# Altium PCB PCB1.PcbDoc
Units mil, origin at the board's own origin, x right, y up, seen from the top; angles counter-clockwise.
Board outline 4204.92 x 2700 mil, 2 copper layers (Top Layer, Bottom Layer); 30 components, 0 nets, 198 pads, 0 vias.
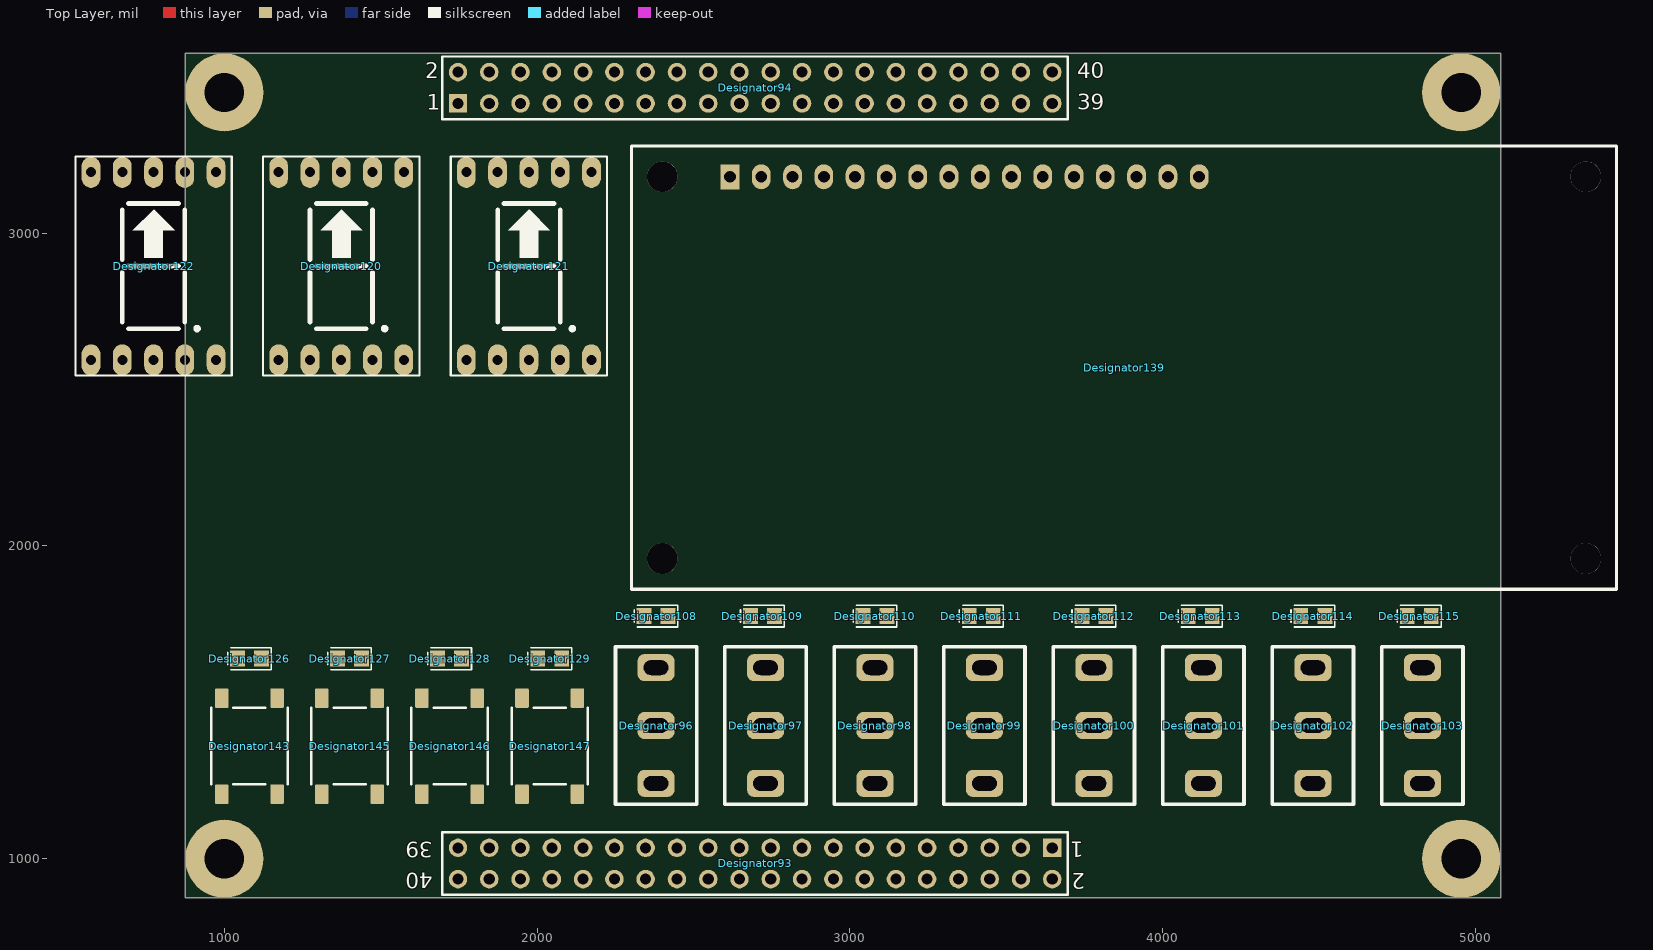
[diagram p0: Top Layer view]
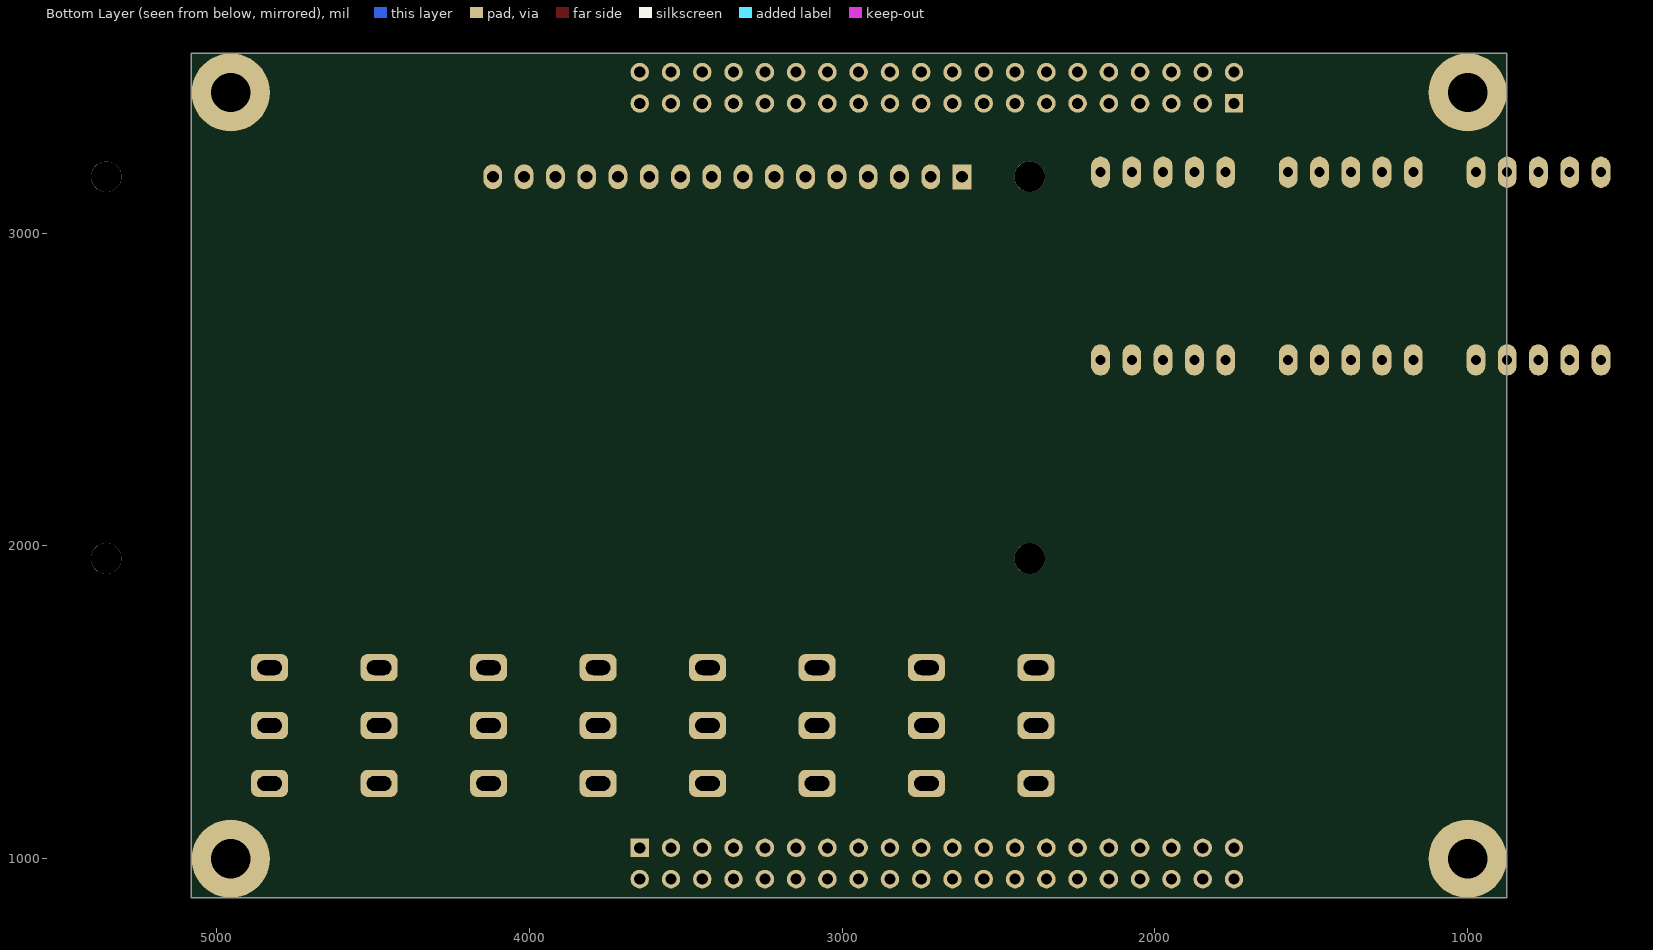
[diagram p1: Bottom Layer view, seen from below]

## Layer stack, top to bottom
Top Solder: solder mask 0.4, Solder Resist, Dk 3.5
Top Layer: signal copper 1.4
Dielectric 1: dielectric 12.6, FR-4, Dk 4.8
Bottom Layer: signal copper 1.4
Bottom Solder: solder mask 0.4, Solder Resist, Dk 3.5

## Board outline
875,875 5079.92,875 5079.92,3575 875,3575

## Design rules (kind name [scope] priority, off if disabled: settings)
Clearance [All] p1: gap=10 ignorepadtopadclearanceinfootprint=FALSE except(0: Arc-Hole Track-Hole SMDPad-Hole THPad-Hole Via-Hole Fill-Hole Poly-Hole Region-Hole Text-Hole)
PolygonConnect [All] p1: connectstyle=Relief reliefconductorwidth=10 reliefentries=4 polygonreliefangle="90 Angle" airgapwidth=10
RoutingVias [All] p1: holewidth=28 width=50 viastyle="Through Hole" minholewidth=28 minwidth=50 maxholewidth=28 maxwidth=50
SolderMaskExpansion [All] p1: expansion=4 istentingtop=FALSE
Width [All] p1: maxlimit=10 minlimit=10 preferedwidth=10
30 further rules are at their usual default settings.

## Components (designator, comment, footprint, x,y, rotation, side; value= is the part's Value field where it differs from the comment)
Designator93 "Comment" HDR2X20 3646.85,1035 r180 top
Designator94 "Comment" HDR2X20 1746.85,3415 r0 top locked
Designator96 "Comment" SW/3/SPDT/SS12D10 2380,1426 r270 top
Designator97 "Comment" SW/3/SPDT/SS12D10 2730,1426 r270 top
Designator98 "Comment" SW/3/SPDT/SS12D10 3080,1426 r270 top
Designator99 "Comment" SW/3/SPDT/SS12D10 3430,1426 r270 top
Designator100 "Comment" SW/3/SPDT/SS12D10 3780,1426 r270 top
Designator101 "Comment" SW/3/SPDT/SS12D10 4130,1426 r270 top
Designator102 "Comment" SW/3/SPDT/SS12D10 4480,1426 r270 top
Designator103 "Comment" SW/3/SPDT/SS12D10 4830,1426 r270 top
Designator108 "Comment" "Led 0805" 2380,1776 r0 top
Designator109 "Comment" "Led 0805" 2720,1776 r0 top
Designator110 "Comment" "Led 0805" 3080,1776 r0 top
Designator111 "Comment" "Led 0805" 3420,1776 r0 top
Designator112 "Comment" "Led 0805" 3780,1776 r0 top
Designator113 "Comment" "Led 0805" 4120,1776 r0 top
Designator114 "Comment" "Led 0805" 4480,1776 r0 top
Designator115 "Comment" "Led 0805" 4820,1776 r0 top
Designator120 "Comment" 7SEGS 1173.5,2595 r0 top
Designator121 "Comment" 7SEGS 1773.5,2595 r0 top
Designator122 "Comment" 7SEGS 573.5,2595 r0 top
Designator126 "Comment" "Led 0805 Blue" 1080,1640 r0 top
Designator127 "Comment" "Led 0805 Blue" 1400,1640 r0 top
Designator128 "Comment" "Led 0805 Blue" 1720,1640 r0 top
Designator129 "Comment" "Led 0805 Blue" 2040,1640 r0 top
Designator139 "Comment" "LCD 16x2" 2616.54,3180.47 r0 top
Designator143 "Comment" SW/4/SMD/XS 1080,1360 r270 top
Designator145 "Comment" SW/4/SMD/XS 1400,1360 r270 top
Designator146 "Comment" SW/4/SMD/XS 1720,1360 r270 top
Designator147 "Comment" SW/4/SMD/XS 2040,1360 r270 top

## Footprints (in the part's own frame and the unit in brackets; to place one, negate y for a bottom-side part, rotate by r counter-clockwise, add the part's x,y. Pads: shape width x height; smd on the part's side, far side on the other; paste and mask are expansions set on the pad)
7SEGS [mil] "DIP 10 Leads; Body 12 x 15 mm; Pitch 0.5 mm"
  oval 60x100 hole 32: 1(0,0) 2(100,0) 3(200,0) 4(300,0) 5(400,0) 6(400,600) 7(300,600) 8(200,600) 9(100,600) 10(0,600)
  silkscreen extent -50,-50 450,650, body extent -50,-75 450,675, height 316
HDR2X20 [mm] "Connector; Header; 20x2 Position"
  rect 1.5x1.5 hole 0.9: 1(0,0)
  round 1.5 hole 0.9: 2(0,2.54) 3(2.54,0) 4(2.54,2.54) 5(5.08,0) 6(5.08,2.54) 7(7.62,0) 8(7.62,2.54) 9(10.16,0) 10(10.16,2.54) 11(12.7,0) 12(12.7,2.54) 13(15.24,0) 14(15.24,2.54) 15(17.78,0) 16(17.78,2.54) 17(20.32,0) 18(20.32,2.54) 19(22.86,0) 20(22.86,2.54) 21(25.4,0) 22(25.4,2.54) 23(27.94,0) 24(27.94,2.54) 25(30.48,0) 26(30.48,2.54) 27(33.02,0) 28(33.02,2.54) 29(35.56,0) 30(35.56,2.54) 31(38.1,0) 32(38.1,2.54) 33(40.64,0) 34(40.64,2.54) 35(43.18,0) 36(43.18,2.54) 37(45.72,0) 38(45.72,2.54) 39(48.26,0) 40(48.26,2.54)
  silkscreen extent -1.27,-1.27 49.53,3.81, body extent -1.42,-1.27 49.68,3.73, height 8.5
"LCD 16x2" [mil]
  rect 60x80 / inner round 60 / far side rect 60x80 hole 38: 1(0,0)
  oval 60x80 / inner round 60 / far side oval 60x80 hole 38: 2(100,0) 3(200,0) 4(300,0) 5(400,0) 6(500,0) 7(600,0) 8(700,0) 9(800,0) 10(900,0) 11(1000,0) 12(1100,0) 13(1200,0) 14(1300,0) 15(1400,0) 16(1500,0)
  round 98.43 hole 98.43: HOLE(-216.54,0) HOLF(2736.22,0) HOLG(2736.22,-1220.47) HOLH(-216.54,-1220.47)
  silkscreen extent -315,-1319 2835,98, body extent -315,-1319 2835,98, height 433
"Led 0805" [mm] "Led SMD 0805"
  rect 1.2x1.3 smd: 1(-0.975,0) 2(0.975,0)
  silkscreen extent -1.78,-0.89 1.78,0.89, body extent -1.01,-0.64 1.01,0.61, height 1.1
"Led 0805 Blue" [mm] "Led SMD 0805"
  rect 1.2x1.3 smd: 1(-0.975,0) 2(0.975,0)
  silkscreen extent -1.78,-0.89 1.78,0.89, body extent -1.01,-0.62 1.01,0.63, height 1.1
SW/3/SPDT/SS12D10 [mm]
  rrect50% 2.2x3 hole 1.2 slot 2 at 90 deg: 1(-4.7,0) 2(0,0) 3(4.7,0)
  silkscreen extent -6.4,-3.3 6.4,3.3, body extent -6.4,-3.3 6.35,3.8, height 12.5
SW/4/SMD/XS [mm]
  rrect20% 1.6x1.1 smd: 1(-3.9,-2.25) 1(3.9,-2.25) 2(-3.9,2.25) 2(3.9,2.25)
  silkscreen extent -3.1,-3.1 3.1,3.1, body extent -4.5,-3 4.5,3, height 7

## Free pads (board coordinates)
  round 250 hole 125.98: ""(1000,1000) ""(1000,3450) ""(4954.33,1000) ""(4954.33,3450)

## Nets (pads, with @x,y where several pads share a name; then routed paths per layer and width w, separated by ;. In a path a pad name is that pad's centre, name@x,y a point inside that pad or via, vN(x,y) a via of type N, cw(c..) or ccw(c..) an arc to the next point about the centre after c; other vN are vias at no path point)
pads on no net: Designator93.1 Designator93.2 Designator93.3 Designator93.4 Designator93.5 Designator93.6 Designator93.7 Designator93.8 Designator93.9 Designator93.10 Designator93.11 Designator93.12 Designator93.13 Designator93.14 Designator93.15 Designator93.16 Designator93.17 Designator93.18 Designator93.19 Designator93.20 Designator93.21 Designator93.22 Designator93.23 Designator93.24 Designator93.25 Designator93.26 Designator93.27 Designator93.28 Designator93.29 Designator93.30 Designator93.31 Designator93.32 Designator93.33 Designator93.34 Designator93.35 Designator93.36 Designator93.37 Designator93.38 Designator93.39 Designator93.40 Designator94.1 Designator94.2 Designator94.3 Designator94.4 Designator94.5 Designator94.6 Designator94.7 Designator94.8 Designator94.9 Designator94.10 Designator94.11 Designator94.12 Designator94.13 Designator94.14 Designator94.15 Designator94.16 Designator94.17 Designator94.18 Designator94.19 Designator94.20 Designator94.21 Designator94.22 Designator94.23 Designator94.24 Designator94.25 Designator94.26 Designator94.27 Designator94.28 Designator94.29 Designator94.30 Designator94.31 Designator94.32 Designator94.33 Designator94.34 Designator94.35 Designator94.36 Designator94.37 Designator94.38 Designator94.39 Designator94.40 Designator96.1 Designator96.2 Designator96.3 Designator97.1 Designator97.2 Designator97.3 Designator98.1 Designator98.2 Designator98.3 Designator99.1 Designator99.2 Designator99.3 Designator100.1 Designator100.2 Designator100.3 Designator101.1 Designator101.2 Designator101.3 Designator102.1 Designator102.2 Designator102.3 Designator103.1 Designator103.2 Designator103.3 Designator108.1 Designator108.2 Designator109.1 Designator109.2 Designator110.1 Designator110.2 Designator111.1 Designator111.2 Designator112.1 Designator112.2 Designator113.1 Designator113.2 Designator114.1 Designator114.2 Designator115.1 Designator115.2 Designator120.1 Designator120.2 Designator120.3 Designator120.4 Designator120.5 Designator120.6 Designator120.7 Designator120.8 Designator120.9 Designator120.10 Designator121.1 Designator121.2 Designator121.3 Designator121.4 Designator121.5 Designator121.6 Designator121.7 Designator121.8 Designator121.9 Designator121.10 Designator122.1 Designator122.2 Designator122.3 Designator122.4 Designator122.5 Designator122.6 Designator122.7 Designator122.8 Designator122.9 Designator122.10 Designator126.1 Designator126.2 Designator127.1 Designator127.2 Designator128.1 Designator128.2 Designator129.1 Designator129.2 Designator139.1 Designator139.2 Designator139.3 Designator139.4 Designator139.5 Designator139.6 Designator139.7 Designator139.8 Designator139.9 Designator139.10 Designator139.11 Designator139.12 Designator139.13 Designator139.14 Designator139.15 Designator139.16 Designator139.HOLE Designator139.HOLF Designator139.HOLG Designator139.HOLH Designator143.1 Designator143.2 Designator145.1 Designator145.2 Designator146.1 Designator146.2 Designator147.1 Designator147.2

## Text inside footprints (layer, text, board x,y; h text height)
Designator93: Top Overlay "1" at 3746.85,1055 h50 r180; Top Overlay "2" at 3751.7,954.23 h50 r180; Top Overlay "40" at 1666.85,955 h50 r180; Top Overlay "39" at 1666.85,1055 h50 r180
Designator94: Top Overlay "39" at 3726.85,3395 h50; Top Overlay "40" at 3726.85,3495 h50; Top Overlay "2" at 1642,3495.77 h50; Top Overlay "1" at 1646.85,3395 h50